# Altium PCB PCS - PCB.PcbDoc
Units mm, origin at the board's own origin, x right, y up, seen from the top; angles counter-clockwise.
Board outline 100 x 70 mm, 2 copper layers (Top Layer, Bottom Layer), stack 1.569 mm thick; 67 components, 31 nets, 259 pads, 122 vias.
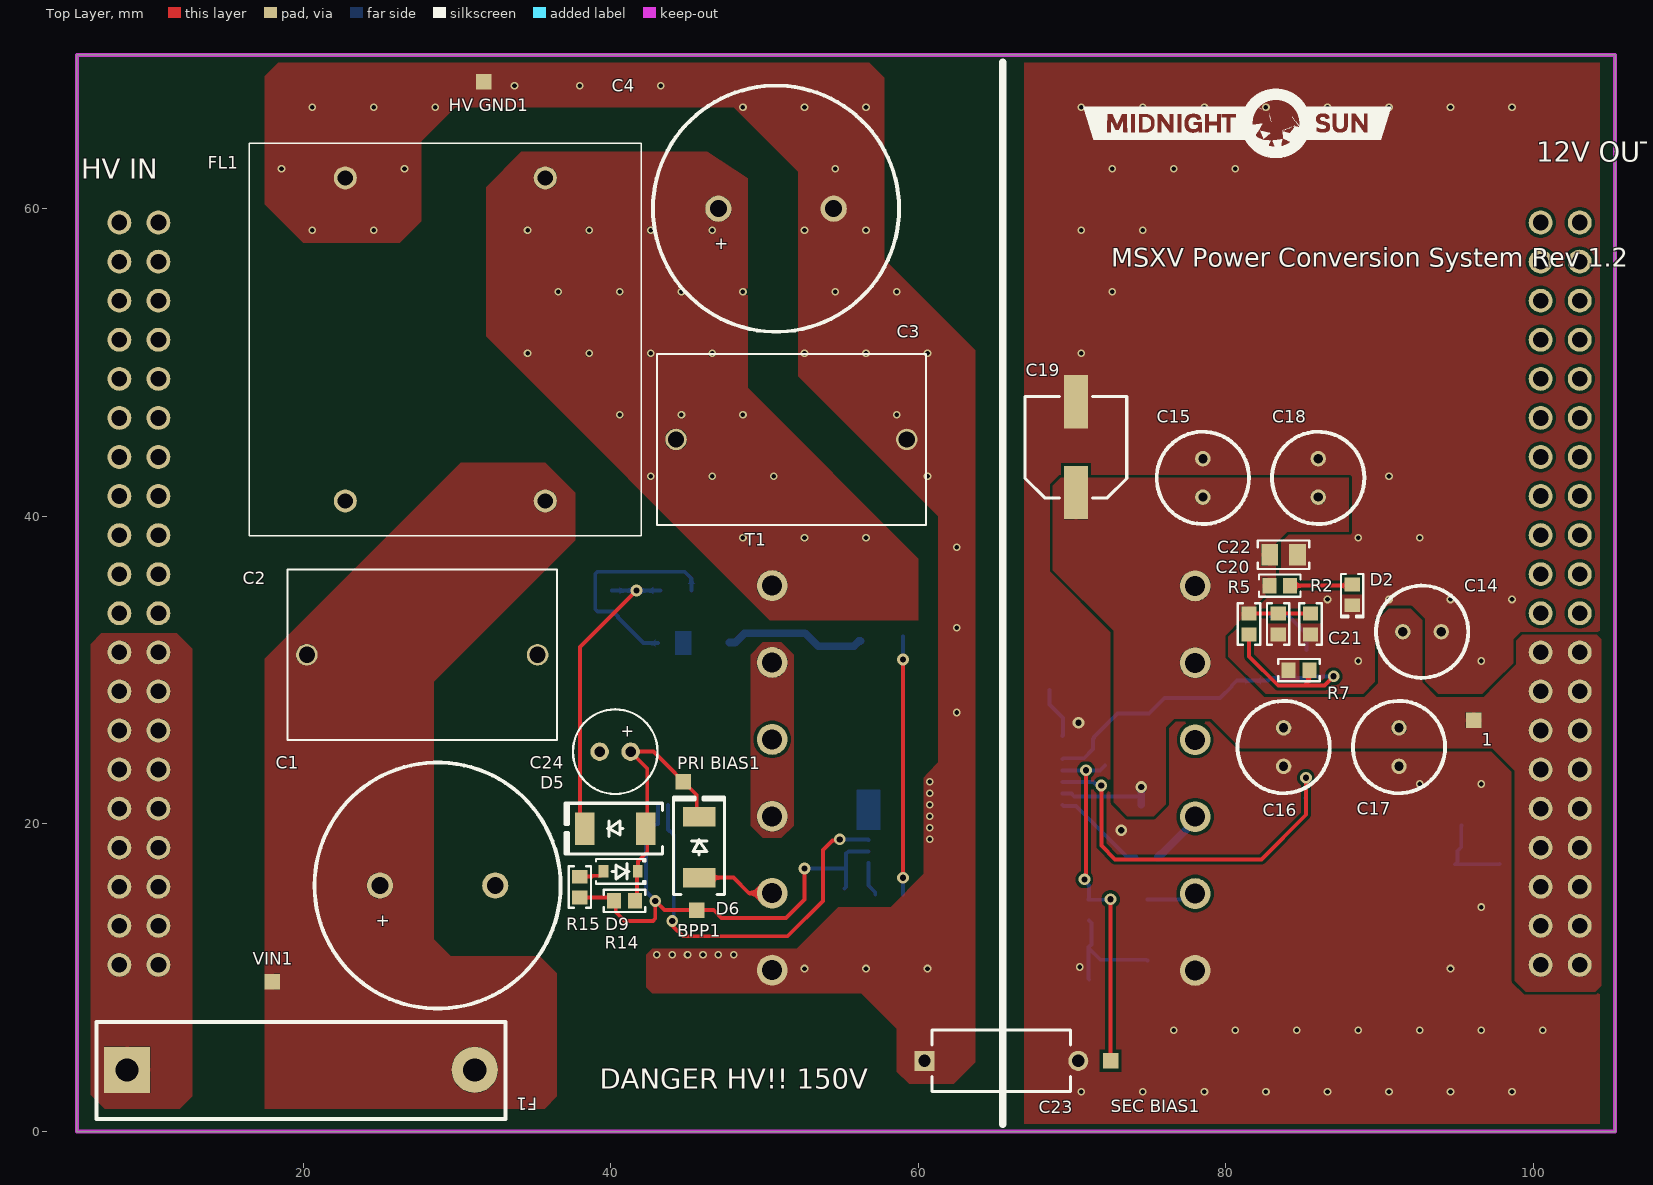
[diagram p0: Top Layer view]
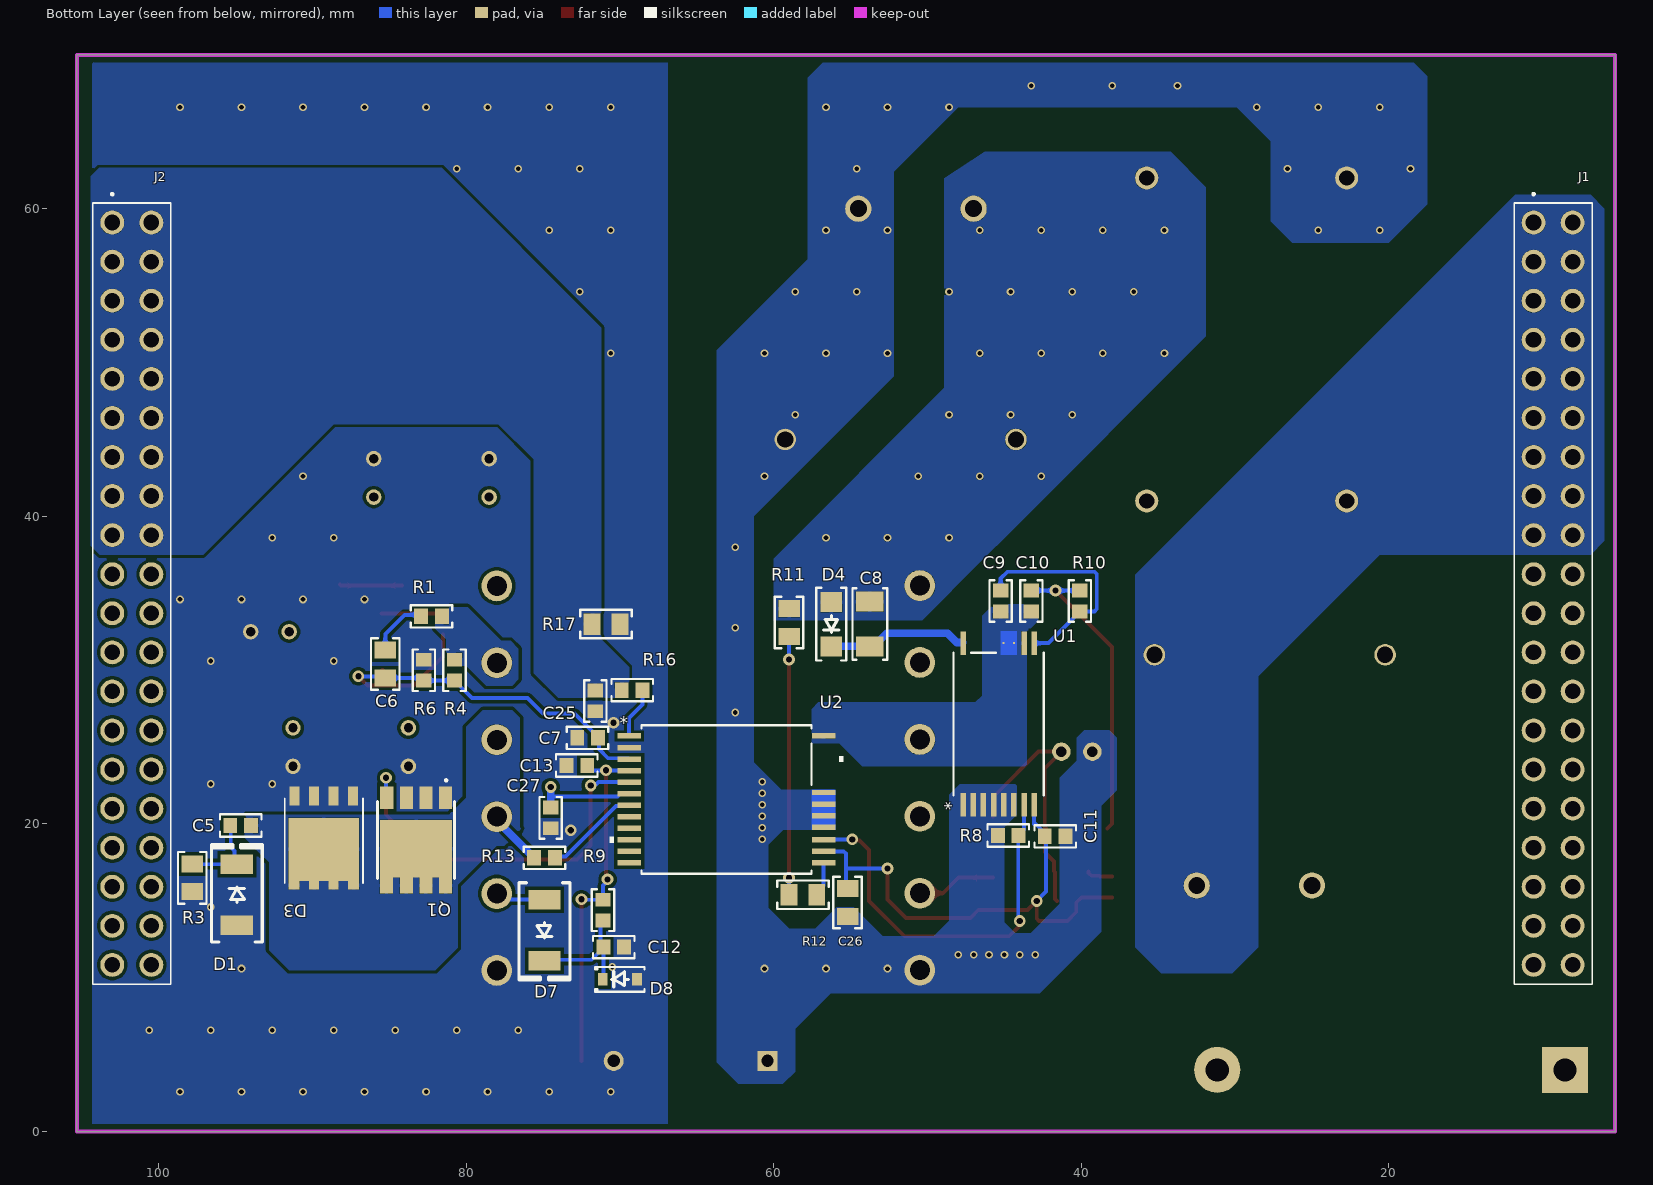
[diagram p1: Bottom Layer view, seen from below]
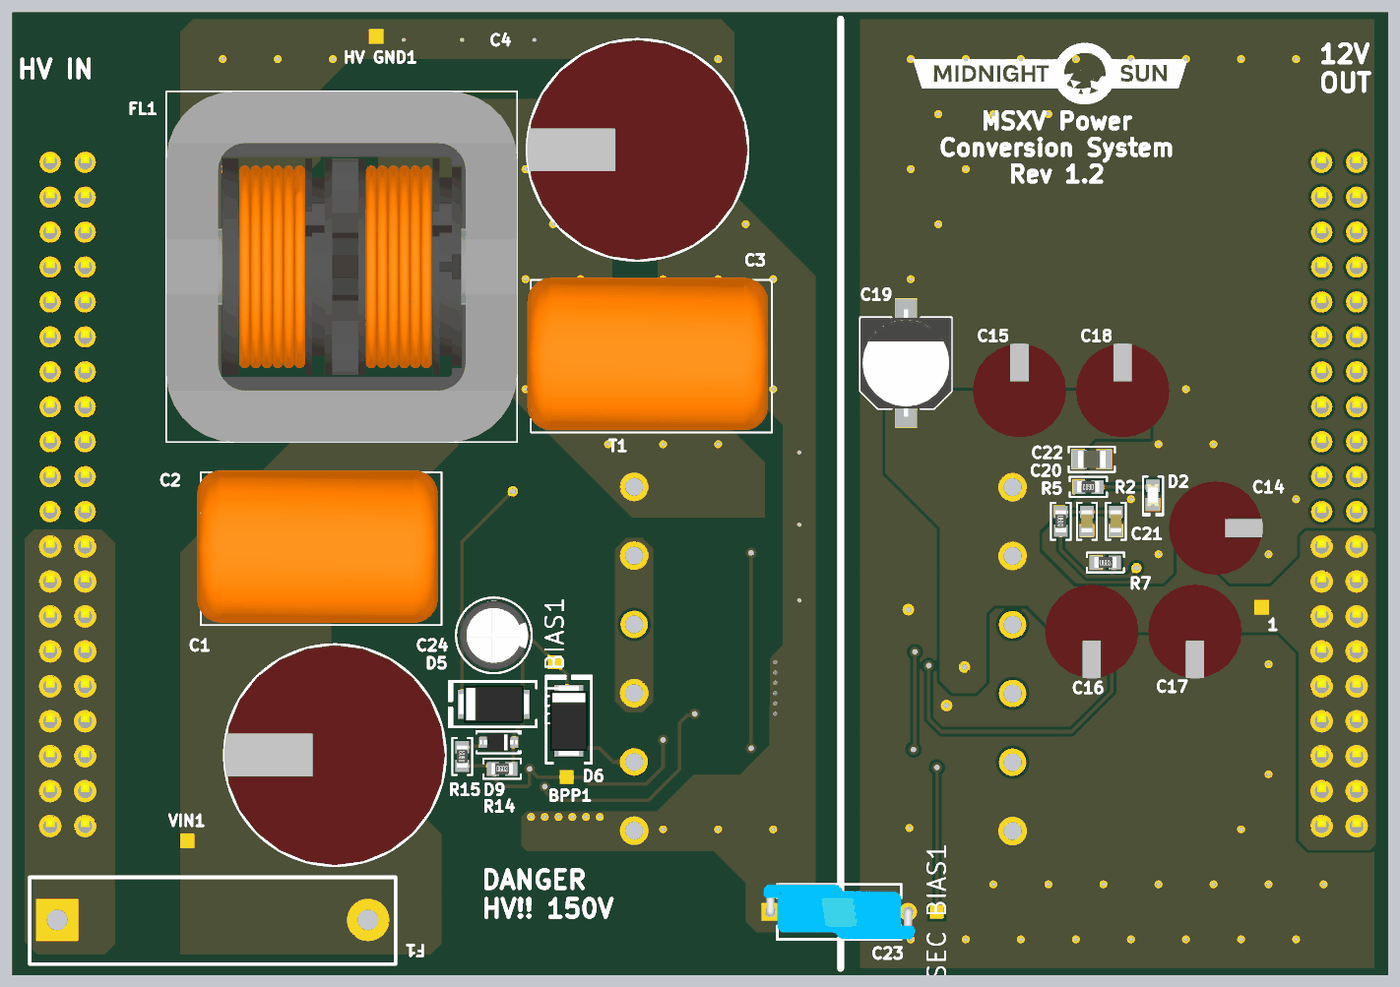
[diagram p2: 3D render of the assembled board from above, using the file's embedded part models]
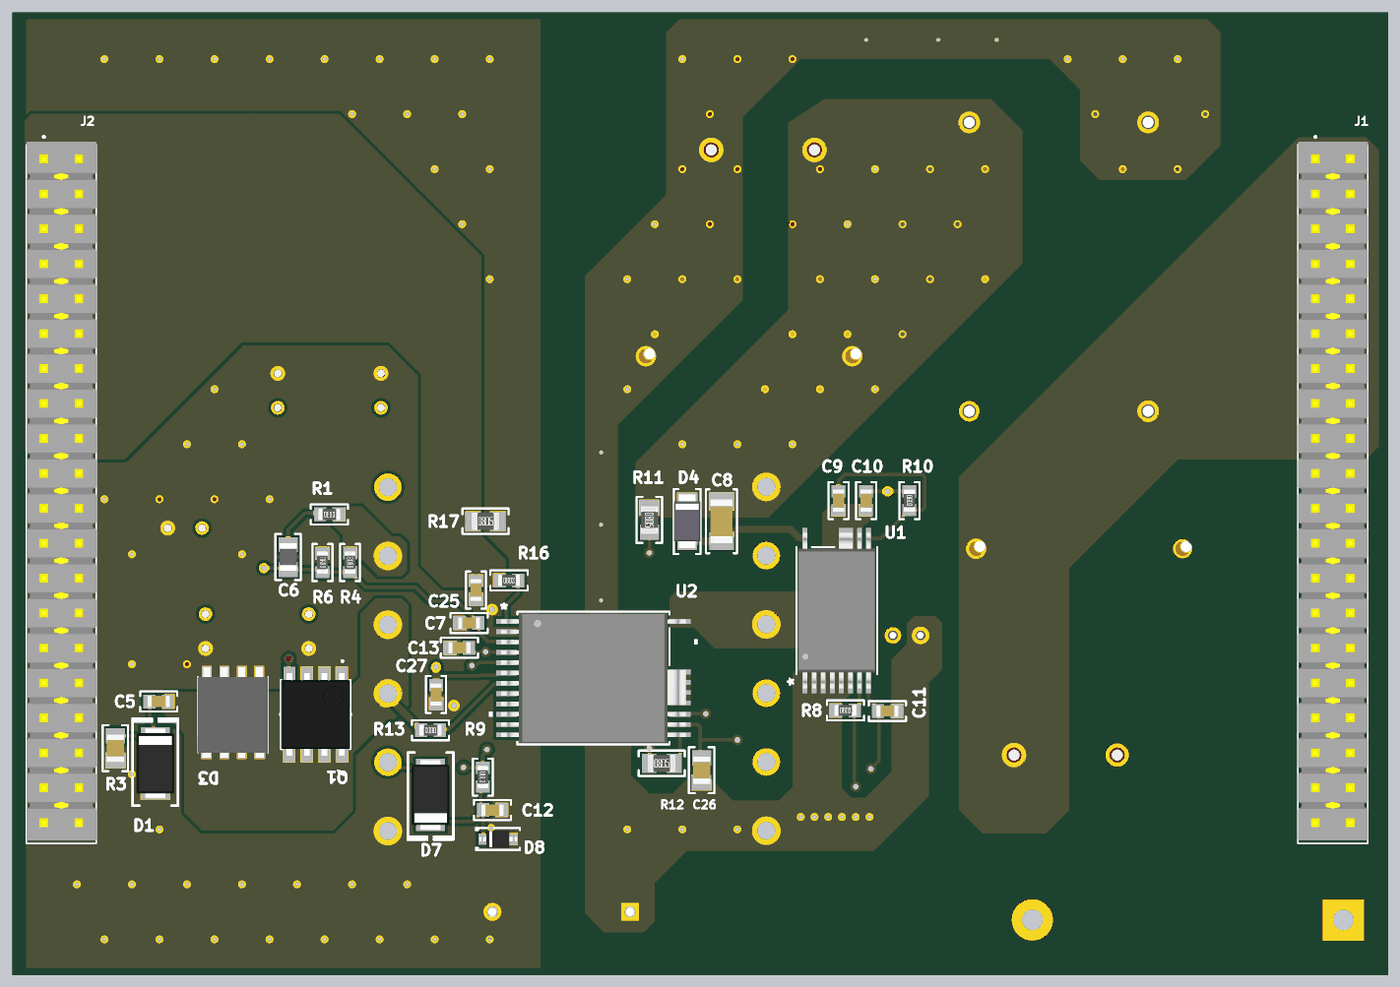
[diagram p3: 3D render of the assembled board from below, using the file's embedded part models]

## Layer stack, top to bottom
Top Solder: solder mask 0.0254, SM-001, Dk 4
Top Layer: signal copper 0.035
Dielectric 1: core 1.4986, Core-043, Dk 4.3
Bottom Layer: signal copper 0.035
Bottom Solder: solder mask 0.0254, SM-001, Dk 4

## Board outline
5.3,0 5.3,70 105.3,70 105.3,0

## Design rules (kind name [scope] priority, off if disabled: settings)
Clearance Clearance_1 [All] p1: gap=0.2 ignorepadtopadclearanceinfootprint=FALSE except(0.127: Arc-Arc Arc-Track Arc-SMDPad Arc-Via Track-Track Track-SMDPad Track-Via SMDPad-SMDPad SMDPad-Via THPad-Via Via-Via Region-Region; 0.15: Arc-Text Track-Text SMDPad-Text THPad-Text Via-Text Fill-Text Poly-Text Region-Text Text-Text; 0.208: Arc-Poly Track-Poly SMDPad-Poly THPad-Poly Via-Poly Fill-Poly Poly-Poly)
Height [All] p1: minheight=0 maxheight=100 prefheight=12.7
HoleSize [All] p1: absolutevalues=TRUE maxlimit=6.3 minlimit=0.2 maxpercent=80.000 minpercent=20.000
MinimumAnnularRing [All] p1: minimumring=0.1
MinimumSolderMaskSliver [All] p1: minsoldermaskwidth=0.026
PasteMaskExpansion [All] p1: expansion=0 percent=-40.000000
PlaneClearance [All] p1: clearance=0.6
PlaneConnect [All] p1: planeconnectstyle=NoConnect reliefexpansion=0.508 reliefentries=4 reliefconductorwidth=0.254 reliefairgap=0.254
PolygonConnect [InNet('GND') or InNet('HV_GND')] p1: connectstyle=Direct reliefconductorwidth=0.254 reliefentries=4 polygonreliefangle="90 Angle" airgapwidth=0.254
RoutingVias [All] p1: holewidth=0.3 width=0.5 viastyle="Through Hole" minholewidth=0.3 minwidth=0.5 maxholewidth=6 maxwidth=10
SilkToSilkClearance [All] p1: silktosilkclearance=0.1
SilkToSolderMaskClearance [IsPad] p1: minsilkscreentomaskgap=0.1 clearancetoexposedcopper=TRUE
SolderMaskExpansion [All] p1: expansion=0.038 istentingtop=FALSE
SupplyNets "Schematic Supply Nets_2" [InNet('GND')] p1: voltage=0.000
SupplyNets "Schematic Supply Nets_1" [InNet('12V')] p2: voltage=0.000
SupplyNets "Schematic Supply Nets" [InNet('HV_GND')] p3: voltage=0.000
Width [All] p1: maxlimit=2.54 minlimit=0.127 preferedwidth=0.254 minimp=50.000000 maximp=50.000000 favimp=50.000000
22 further rules are at their usual default settings.

## Classes and differential pairs
net class HV: HV_IN HV_POS NetC1_1
net class 5A: HV_IN HV_POS NetC1_1

## Components (designator, comment, footprint, x,y, rotation, side; value= is the part's Value field where it differs from the comment)
1 "Test Point SMD" "Test Point"#1 96.1,27 r90 top
BPP1 "Test Point SMD" "Test Point"#2 45.6,14.4 r90 bottom
C1 "CAP ALUM 47UF 20% 350V RADIAL TH" "Radial e7.5mm h27" 28.75,16 r0 top
C2 "CAP FILM 2.2UF 5% 450VDC RADIAL" "CAP FILM 2.2UF 5% 450VDC RADIAL-Footprint-1" 27.75,31 r180 top
C3 "CAP FILM 2.2UF 5% 450VDC RADIAL" "CAP FILM 2.2UF 5% 450VDC RADIAL-Footprint-1" 51.75,45 r180 top
C4 "CAP ALUM 100UF 20% 200V RADIAL" "Radial e7.5mm h27" 50.75,60 r0 top
C5 "CAP CER 2.2NF 50V 10% X7R 0603" "CAP 0603_1608" 94.65,19.9 r0 bottom
C6 "CAP CER 0.1UF 250V X7R 0805" "FER 0805_2012" 85.25,30.4 r90 bottom
C7 "CAP CER 330PF 250V X7R 0603" "CAP 0603_1608" 72.1,25.6 r0 bottom
C8 "CAP CER 0.1UF 250V X7R 1206" "CAP 1206_3216" 53.75,33 r90 bottom
C9 "CAP CER 0.1UF 100V 10% X7R 0603" "CAP 0603_1608" 45.25,34.5 r270 bottom
C10 "CAP CER 1UF 50V X5R 0603" "CAP 0603_1608" 43.25,34.5 r270 bottom
C11 "CAP CER 0.1UF 100V 10% X7R 0603" "CAP 0603_1608" 41.7,19.2 r0 bottom
C12 "CAP CER 10UF 25V 20% X5R 0603" "CAP 0603_1608" 70.4,12 r180 bottom
C13 "CAP CER 2.2UF 25V 10% X5R 0603" "CAP 0603_1608" 72.8,23.8 r0 bottom
C14 "CAP ALUM 220UF 20% 25V RADIAL" "CAP ALUM 220UF 20% 25V RADIAL-Footprint-1" 92.75,32.5 r0 top
C15 "CAP ALUM 220UF 20% 25V RADIAL" "CAP ALUM 220UF 20% 25V RADIAL-Footprint-1" 78.5,42.5 r90 top
C16 "CAP ALUM 220UF 20% 25V RADIAL" "CAP ALUM 220UF 20% 25V RADIAL-Footprint-1" 83.75,25 r270 top
C17 "CAP ALUM 220UF 20% 25V RADIAL" "CAP ALUM 220UF 20% 25V RADIAL-Footprint-1" 91.25,25 r270 top
C18 "CAP ALUM 220UF 20% 25V RADIAL" "CAP ALUM 220UF 20% 25V RADIAL-Footprint-1" 86,42.5 r90 top
C19 "CAP ALUM 47UF 20% 35V SMD" "CAP ALUM 6.3MM RADIAL SMD" 70.25,44.5 r90 top
C20 "CAP CER 10UF 25V 20% X5R 0603" "CAP 0603_1608" 83.4,33 r90 top
C21 "CAP CER 1UF 50V X5R 0603" "CAP 0603_1608" 85.5,33 r90 top
C22 "CAP CER 0.1UF 250V X7R 0805" "FER 0805_2012" 83.75,37.5 r180 top
C23 "CAP CER 2200PF 250V RADIAL" FP-DE1_D9_T4_F10_d0_6-0_0-MFG 65.4,4.6 r0 top
C24 "CAP ALUM 10UF 20% 100V RADIAL TH" FP-RAD-TH-D_5_0_5-L_11_1-MFG 40.3,24.7 r180 top
C25 "CAP CER 4.7UF 25V 10% X5R 0603" "CAP 0603_1608" 71.6,28 r90 bottom
C26 "CAP CER 4.7UF 50V 10% X5R 0805" "CAP 0805_2012" 55.2,14.9 r90 bottom
C27 "CAP CER 10UF 25V 20% X5R 0603" "CAP 0603_1608" 74.5,20.4 r90 bottom
D1 "ULTRA FAST RECOVERY RECTIFIERS 2" "DO 214AC SMA" 94.9,15.4 r90 bottom
D2 "LED GREEN CLEAR 2V 0603" "LED 0603_1608" 88.2,34.9 r270 top
D3 "DIODE SCHOTTKY 170V 30A PWRFLAT" "New footprint 1"#1 89.25,18.925 r0 bottom
D4 "DIODE ZENER 200V 800MW DO219AB" "DIODE ZENER 200V 800MW DO219AB-Footprint-1" 56.25,33 r270 bottom
D5 "ULTRA FAST RECOVERY RECTIFIERS 2" "DO 214AC SMA" 40.3,19.7 r180 top
D6 "ULTRA FAST RECOVERY RECTIFIERS 2" "DO 214AC SMA" 45.75,18.5 r90 top
D7 "ULTRA FAST RECOVERY RECTIFIERS 2" "DO 214AC SMA" 74.9,13.1 r270 bottom
D8 "DIODE, ZENER, 0.20W, 11.0V, 2%," "SOD 323" 70,9.9 r0 bottom
D9 "DIODE, ZENER, 0.20W, 11.0V, 2%," "SOD 323" 40.65,16.925 r0 top
F1 "FUSE CERAMIC 5A 600VAC/500VDC" 0ADKC5000-BE-Footprint-1 30.7,3.8 r90 top
FL1 "CMC 4.1MH 5A 2LN TH" "New footprint 1"#2 35.75,41 r90 top
"HV GND1" "Test Point SMD" "Test Point"#3 31.75,68.25 r90 top
J1 "CONN HDR .100\" 40POS" "CONN HDR .100\" 40POS-Footprint-1" 10.6,59.1 r270 bottom
J2 "CONN HDR .100\" 40POS" "CONN HDR .100\" 40POS-Footprint-1" 103,59.1 r270 bottom
"PRI BIAS1" "Test Point SMD" "Test Point"#3 44.725,22.75 r90 top
Q1 "MOSFET N-CH 100V 90A 8SOP" TPH3R70APL,L1Q 83.25,18.95 r0 bottom
R1 "RES 162K OHM 1% 1/10W 0603" "RES 0603_1608" 82.25,33.5 r180 bottom
R2 "RES 604 OHM 1% 1/10W 0603" "RES 0603_1608" 83.5,35.5 r180 top
R3 "RES 10 OHM 1% 1/2W 0805" "CAP 0805_2012" 97.8,16.5 r270 bottom
R4 "RES 127K OHM 1% 1/10W 0603" "RES 0603_1608" 80.75,30 r90 bottom
R5 "RES 0 OHM JUMPER 1/10W 0603" "RES 0603_1608" 81.5,33 r270 top
R6 "RES 14.3K OHM 1% 1/10W 0603" "RES 0603_1608" 82.75,30 r270 bottom
R7 "RES 0 OHM JUMPER 1/10W 0603" "RES 0603_1608" 84.75,30 r0 top
R8 "RES 15K OHM 1% 1/10W 0603" "RES 0603_1608" 44.75,19.25 r180 bottom
R9 "RES 47 OHM 1% 1/10W 0603" "RES 0603_1608" 71.1,14.4 r270 bottom
R10 "RES 1K OHM 1% 1/10W 0603" "RES 0603_1608" 40.1,34.5 r270 bottom
R11 "RES SMD 910K OHM 0.5% 1/4W 0805" "RES 0805_2012" 59,33.1 r270 bottom
R12 "RES SMD 910K OHM 0.5% 1/4W 0805" "RES 0805_2012" 58.1,15.4 r180 bottom
R13 "RES 300 OHM 1% 1/10W 0603" "RES 0603_1608" 74.9,17.8 r0 bottom
R14 "RES 1K OHM 1% 1/10W 0603" "RES 0603_1608" 40.9,15 r0 top
R15 "RES 100 OHM 1% 1/10W 0603" "RES 0603_1608" 38,15.9 r90 top
R16 "RES 10 OHM 1% 1/10W 0603" "RES 0603_1608" 69.2,28.7 r180 bottom
R17 "RES 0.006 OHM 1% 3/4W 0805" "RES 0805_2012" 70.9,33 r180 bottom
"SEC BIAS1" "Test Point SMD" "Test Point"#3 72.5,4.6 r90 top
T1 "EFD-30 PCS 240uH Transformer B66423GX187" "EFD-30 PCS 240uH Transformer B66423GX187-Footprint-1" 64.25,23 r270 top locked
U1 "CPZ1075M-TL" CPZ1076M-Footprint-1 45.25,26.5 r90 bottom
U2 "INN4077C-H182-TL" INN4074C-H185-Footprint-1 63.25,21.5 r180 bottom
VIN1 "Test Point SMD" "Test Point"#3 18,9.75 r90 top

## Footprints (in the part's own frame and the unit in brackets; to place one, negate y for a bottom-side part, rotate by r counter-clockwise, add the part's x,y. Pads: shape width x height; smd on the part's side, far side on the other; paste and mask are expansions set on the pad)
0ADKC5000-BE-Footprint-1 [mm]
  rect 3x3 hole 1.5: 1(0.217,22.135)
  round 3 hole 1.5: 2(0.217,-0.465)
  silkscreen extent -2.98,-2.46 3.32,24.14, body extent -2.98,-2.46 3.32,24.14, height 8.13
"CAP 0603_1608" [mm] "Chip Capacitor, 2-Leads, Body 1.60x0.80mm, IPC Medium Density"
  rect 0.9x1 smd: 1(-0.675,0) 2(0.675,0)
  silkscreen extent -1.35,-0.72 1.35,0.72, body extent -0.8,-0.41 0.8,0.41, height 0.82
"CAP 0805_2012" [mm] "Chip Capacitor, 2-Leads, Body 2.00x1.20mm, IPC Medium Density"
  rect 1.1x1.4 smd: 1(-0.9,0) 2(0.9,0)
  silkscreen extent -1.68,-0.92 1.68,0.92, body extent -1,-0.64 1,0.64, height 1.26
"CAP 1206_3216" [mm] "Chip Capacitor, 2-Leads, Body 3.25x1.60mm, IPC Medium Density"
  rect 1.3x1.8 smd: 1(-1.45,0) 2(1.45,0)
  silkscreen extent -2.32,-1.12 2.32,1.12, body extent -1.6,-0.81 1.6,0.81, height 1.62
"CAP ALUM 6.3MM RADIAL SMD" [mm] "Aluminum Electrolytic Capacitor, Body 6.50x6.50x5.50mm, IPC Low Density"
  rect 3.45x1.55 smd: 1(-2.95,0) 2(2.95,0)
  silkscreen extent -3.3,-3.3 3.3,3.3, body extent -3.9,-3.3 3.9,3.3, height 5.5
"CAP ALUM 220UF 20% 25V RADIAL-Footprint-1" [mm]
  round 1 hole 0.6: 1(-1.25,0) 2(1.25,0)
  silkscreen extent -3,-3 3,3, body extent -3.4,-3.4 3.43,3.4, height 12.26
"CAP FILM 2.2UF 5% 450VDC RADIAL-Footprint-1" [mm]
  round 1.4 hole 1.05: 1(-7.5,0) 2(7.5,0)
  silkscreen extent -8.75,-5.55 8.75,5.55, body extent -8.48,-5.72 9.02,5.39, height 15.88
"CONN HDR .100\" 40POS-Footprint-1" [mm]
  round 1.55 hole 1.02: 1(0,0) 2(2.54,0) 3(5.08,0) 4(7.62,0) 5(10.16,0) 6(12.7,0) 7(15.24,0) 8(17.78,0) 9(20.32,0) 10(22.86,0) 11(25.4,0) 12(27.94,0) 13(30.48,0) 14(33.02,0) 15(35.56,0) 16(38.1,0) 17(40.64,0) 18(43.18,0) 19(45.72,0) 20(48.26,0) 21(48.26,2.54) 22(45.72,2.54) 23(43.18,2.54) 24(40.64,2.54) 25(38.1,2.54) 26(35.56,2.54) 27(33.02,2.54) 28(30.48,2.54) 29(27.94,2.54) 30(25.4,2.54) 31(22.86,2.54) 32(20.32,2.54) 33(17.78,2.54) 34(15.24,2.54) 35(12.7,2.54) 36(10.16,2.54) 37(7.62,2.54) 38(5.08,2.54) 39(2.54,2.54) 40(0,2.54)
  silkscreen extent -1.9,-1.27 49.53,3.81, body extent -1.51,-1.27 49.29,3.81, height 10.67
CPZ1076M-Footprint-1 [mil]
  rect 60x14 smd paste+0 mask+0: 1(-207,95.94) 2(-207,69.96) 3(-207,43.98) 4(-207,17.99) 5(-207,-7.99) 6(-207,-33.98) 7(-207,-59.96) 8(-207,-85.94) 9(207,-85.94) 10(207,-59.96) 16(207,95.94)
  rect 5x5 smd paste-2.5 mask-2.5: 11(207,-33.98) 12(207,-7.99)
  Top Layer region: 177,-0.99 237,-0.99 237,-40.98 177,-40.98
  silkscreen extent -182,-111 182,121, body extent -223,-106 223,116, height 67
"DIODE ZENER 200V 800MW DO219AB-Footprint-1" [mm]
  rect 1.3x1.4 smd: 1(1.45,0) 2(-1.425,0)
  silkscreen extent -2.35,-0.97 2.37,0.97, body extent -1.95,-0.95 1.95,0.95, height 1.08
"DO 214AC SMA" [mm] "Molded Diode, 2-Leads, Body 4.30x2.60mm, IPC Medium Density"
  rect 1.27x2.1 smd: 1(1.985,0) 2(-1.985,0)
  silkscreen extent -3.08,-1.65 3.25,1.65, body extent -2.6,-1.37 2.6,1.37, height 2.4
"EFD-30 PCS 240uH Transformer B66423GX187-Footprint-1" [mm]
  round 2 hole 1.3: 1(-12.5,-13.75) 2(-7.5,-13.75) 3(-2.5,-13.75) 4(2.5,-13.75) 5(7.5,-13.75) 6(12.5,-13.75) 7(12.523,13.75) 8(7.523,13.75) 9(2.523,13.75) 10(-2.477,13.75) 11(-7.477,13.75) 12(-12.477,13.75)
  body extent -15,-15.5 15,15.5, height 13.1
"FER 0805_2012" [mm] "Chip Ferrite, 2-Leads, Body 2.00x1.20mm, IPC Medium Density"
  rect 1.1x1.4 smd: 1(-0.9,0) 2(0.9,0)
  silkscreen extent -1.68,-0.92 1.68,0.92, body extent -1,-0.64 1,0.64, height 1.26
FP-DE1_D9_T4_F10_d0_6-0_0-MFG [mm]
  rect 1.3x1.3 hole 0.8 paste-2539.97 mask+0: 1(-5,0)
  round 1.3 hole 0.8 paste-2539.97 mask+0: 2(5,0)
  silkscreen extent -4.5,-2 4.5,2, body extent -5.5,-2 5.5,2, height 12
FP-RAD-TH-D_5_0_5-L_11_1-MFG [mm]
  round 1.2 hole 0.7: 1(-1,0) 2(1.016,0)
  silkscreen extent -2.75,-2.75 2.75,2.75, body extent -2.85,-2.85 2.85,2.85, height 0.25
INN4074C-H185-Footprint-1 [mil]
  rect 60x14 smd paste+0 mask+0: 1(-241.34,166.23) 2(-241.34,136.7) 3(-241.34,107.17) 4(-241.34,77.64) 5(-241.34,48.12) 6(-241.34,18.59) 7(-241.34,-10.94) 8(-241.34,-40.47) 9(-241.34,-69.99) 10(-241.34,-99.52) 11(-241.34,-129.05) 12(-241.34,-158.58) 13(255.66,-158.58) 14(255.66,-129.05) 15(255.66,-99.52) 16(255.66,-67.04) 17(255.66,-37.51) 18(255.66,-7.99) 19(255.66,21.54) 24(255.66,166.23)
  Top Layer region: 225.66,-74.04 225.66,28.54 285.66,28.54 285.66,-74.04
  silkscreen extent -291,-186 306,194, body extent -257,-181 272,189, height 63
"LED 0603_1608" [mm] "Chip Diode, 2-Leads, Body 1.60x0.80mm, IPC Medium Density"
  rect 0.9x1 smd: 1(0.675,0) 2(-0.675,0)
  silkscreen extent -1.35,-0.72 1.48,0.72, body extent -0.8,-0.4 0.8,0.4, height 0.53
"New footprint 1"#1 [mm]
  rect 0.65x1.25 smd: 1(-1.905,-2.9) 1(-0.635,-2.9) 1(0.635,-2.9) 1(1.905,-2.9)
  rect 0.725x0.55 smd: 2(-1.938,2.9) 2(1.938,2.9)
  rect 0.638x0.55 smd: 2(-0.631,2.9) 2(0.631,2.9)
  rect 4.6x4.1 smd: 2(0,0.575)
  silkscreen extent -2.55,-2.76 2.55,2.76, body extent -2.55,-3.46 2.55,3.12, height 1.1
"New footprint 1"#2 [mm]
  round 1.5 hole 1: 1(0,0) 2(0,13) 3(21,13) 4(21,0)
  silkscreen extent -2.25,-6.25 23.25,19.25, body extent -2.25,-6.25 23.25,19.25, height 17.88
"Radial e7.5mm h27" [mm]
  round 1.7 hole 1.1: 1(-3.75,0) 2(3.75,0)
  silkscreen extent -8,-8 8,8, body extent -8.02,-8 8,8, height 37.51
"RES 0603_1608" [mm] "Chip Resistor, 2-Leads, Body 1.60x0.80mm, IPC Medium Density"
  rect 0.9x1 smd: 1(-0.675,0) 2(0.675,0)
  silkscreen extent -1.35,-0.72 1.35,0.72, body extent -0.8,-0.4 0.8,0.4, height 0.45
"RES 0805_2012" [mm] "Chip Resistor, 2-Leads, Body 2.00x1.25mm, IPC Medium Density"
  rect 1.1x1.4 smd: 1(-0.9,0) 2(0.9,0)
  silkscreen extent -1.68,-0.92 1.68,0.92, body extent -1,-0.62 1,0.63, height 0.6
"SOD 323" [mm] "SOD, 2-Leads, Body 1.25x2.50mm, IPC Medium Density"
  rect 0.625x0.83 smd: 1(1.112,0) 2(-1.112,0)
  silkscreen extent -1.6,-0.8 1.6,0.8, body extent -1.36,-0.63 1.36,0.62, height 1.05
"Test Point"#1 [mm]
  rect 1x1 smd paste-2: TP(-0.25,0)
"Test Point"#2 [mm]
  rect 1x1 smd far side paste-2: TP(0,0)
"Test Point"#3 [mm]
  rect 1x1 smd paste-2: TP(0,0)
TPH3R70APL,L1Q [mm]
  rect 0.85x1.45 smd: 1(1.905,-2.75) 2(-1.905,-2.75) 2(-0.635,-2.75) 2(0.635,-2.75)
  rect 0.85x1.05 smd: 3(-1.925,2.95) 3(-0.635,2.95) 3(0.635,2.95) 3(1.925,2.95)
  rect 4.7x3.75 smd: 3(0,0.55)
  silkscreen extent -2.5,-3.93 2.5,2.5, body extent -2.65,-3 2.65,3, height 0.95

## Part data
1 BPP1 "HV GND1" "PRI BIAS1" "SEC BIAS1" VIN1: library part CMP-004-0000-4, "1.27mm x 1.27mm SMD Square"
C1: library part CMP-001-00158-1, "47 µF 350 V Aluminum Electrolytic Capacitors Radial, Can 2000 Hrs @ 105°C", Capacitance=47µF, Case/Package=Radial, Dielectric Code="Aluminum Electrolytic", Tolerance=20%, Voltage Rating=350V
C2 C3: library part CMP-001-00150-1, "2.2 µF Film Capacitor 450V Polypropylene (PP), Metallized Radial", Capacitance=2.2µF, Case/Package=7450, Tolerance=5%, Voltage Rating=450V
C4: library part CMP-001-00159-3, "100 µF 200 V Aluminum Electrolytic Capacitors Radial, Can 2000 Hrs @ 105°C", Capacitance=100µF, Case/Package=Radial, Dielectric Code="Aluminum Electrolytic", Tolerance=20%, Voltage Rating=200V
C5: library part CMP-001-00089-6, "±10% 50V Ceramic Capacitor X7R 0603 (1608 Metric)", Capacitance=2.2nF, Case/Package=0603, Dielectric Code=X7R, Tolerance=10%, Voltage Rating=50V
C6 C22: library part CMP-001-00145-1, "Ceramic Capacitor, Multilayer, Ceramic, 250V, 10% +Tol, 10% -Tol, X7R, 15% TC, 0.1uF, Surface Mount, 0805", Capacitance=100nF, Case/Package=0805, Dielectric Code=X7R, Tolerance=10%, Voltage Rating=250V
C7: library part CMP-001-00020-1, "330 pF ±10% 250V Ceramic Capacitor X7R 0603 (1608 Metric)", Capacitance=330pF, Case/Package=0603, Dielectric Code=X7R, Tolerance=10%, Voltage Rating=250V
C8: library part CMP-001-00147-1, "0.1 µF ±10% 250V Ceramic Capacitor X7R 1206 (3216 Metric)", Capacitance=100nF, Case/Package=1206, Dielectric Code=X7R, Tolerance=10%, Voltage Rating=250V
C9 C11: library part CMP-013-0022-14, "Ceramic Capacitor, Multilayer, Ceramic, 100V, 10% +Tol, 10% -Tol, X7R, 15% TC, 0.1uF, Surface Mount, 0603", Capacitance=100nF, Case/Package=0603, Dielectric Code=X7R, Tolerance=10%, Voltage Rating=100V
C10 C21: library part CMP-013-0013-8, "1µF ±10% 50V Ceramic Capacitor X7R 0603 (1608 Metric)", Capacitance=1µF, Case/Package=0603, Dielectric Code=X5R, Tolerance=10%, Voltage Rating=50V
C12 C20 C27: library part CMP-013-0018-6, "10µF ±20% 25V Ceramic Capacitor X5R 0603 (1608 Metric)", Capacitance=10µF, Case/Package=0603, Dielectric Code=X5R, Tolerance=20%, Voltage Rating=25V
C13: library part CMP-013-0100-6, "2.2µF ±10% 25V Ceramic Capacitor X5R 0603 (1608 Metric)", Capacitance=2.2µF, Case/Package=0603, Dielectric Code=X5R, Tolerance=10%, Voltage Rating=25V
C14 C15 C16 C17 C18: library part CMP-001-00144-1, "220 µF 25 V Aluminum Electrolytic Capacitors Radial, Can 2000 Hrs @ 85°C", Capacitance=220µF, Case/Package=SMT, Tolerance=20%, Voltage Rating=25V
C19: library part CMP-013-0000-4, "47µF 35V Aluminum Electrolytic Capacitors Radial, Can - SMD 1000 Hrs @ 85°C", Capacitance=47µF, Case/Package=Radial, Tolerance=20%, Voltage Rating=35V
C23: library part CMP-001-00157-1, "2200 pF ±20% 250VAC Ceramic Capacitor E Radial, Disc", Capacitance=2.2nF, Case/Package=Radial, Dielectric Code=Ceramic, Tolerance=20%, Voltage Rating=250V
C24: library part CMP-001-00029-3, "10 µF 100 V Aluminum Electrolytic Capacitors Radial, Can 2000 Hrs @ 85°C", Capacitance=10µF, Case/Package=Radial, Tolerance=20%, Voltage Rating=100V
C25: library part CMP-013-0104-5, "4.7µF ±10% 25V Ceramic Capacitor X5R 0603 (1608 Metric)", Capacitance=4.7µF, Case/Package=0603, Dielectric Code=X7R, Tolerance=10%, Voltage Rating=25V
C26: library part CMP-013-0066-5, "4.7µF ±20% 50V Ceramic Capacitor X5R 0805 (2012 Metric)", Capacitance=4.7µF, Case/Package=0805, Dielectric Code=X5R, Tolerance=20%, Voltage Rating=50V
D1 D5 D6 D7: library part CMP-004-00072-2, "Diode 200 V 1A Surface Mount SMA/DO-214AC", Case/Package=DO-214AC-SMA, Forward Current=1A, Forward Voltage=1V, Reverse Blocking Voltage=200V
D2: library part CMP-011-0001-9, "Green 562nm LED Indication - Discrete 2V 0603 (1608 Metric)", Case/Package="0603 (1608 Metric)", Colour=Green, Forward Current=20mA, Forward Voltage=2V
D3: library part CMP-004-00074-2, "Diode 170 V 30A Surface Mount PowerFlat™ (5x6)", Case Connection=CATHODE, Case/Package=8-PowerVDFN, Forward Current=30A, Forward Voltage=700mV, Max Operating Temperature=175°C, Non-rep Pk Forward Current-Max=200A, Package Body Material=Plastic, Package Shape=Rectangular, Package Style="SMALL OUTLINEMeter", Peak Reflow Temperature (Cel)=260°C, Rep Pk Reverse Voltage-Max=170V, Additional Feature="FREE WHEELING DIODE", Application(s)="FAST RECOVERY POWER", Diode Element Material=SILICON, Diode Type=RECTIFIER, JESD-609 Code=e3, Max Output Current=30A, Moisture Sensitivity Level=1, Number of Elements=1, Number of Phases=1, Pins=3, Qualification Status="Not Qualified", Reach SVHC Compliant=No, Reverse Blocking Voltage=170V, RoHS Compliant=Yes, Surface Mount=Yes, Technology=SCHOTTKY, Terminal Finish=Tin, Terminal Form="No Lead", Terminal Position=DUAL
D4: library part CMP-004-00005-2, "Zener Diode 200 V 800 mW Surface Mount DO-219AB (SMF)", Breakdown Voltage=200V, Case/Package=DO-219AB, Reverse Blocking Voltage=200V, Type=Zener
D8 D9: library part CMP-004-00076-1, "Zener Diode 11 V 200 mW ±2% Surface Mount SOD-323", Breakdown Voltage=11V, Case/Package="SOD 323", Reverse Blocking Voltage=11V, Type=Zener
F1: library part CMP-005-00013-1, "FUSE CERAMIC 5A 600VAC/500VDC FOOTPRINT IS FOR 5x20mm HOLDER", Current Rating=5A, Max Operating Temperature=125°C, Min Operating Temperature=-55°C, Voltage Rating (AC)=600V, Voltage Rating (DC)=500V, Approvals=cURus, Fuse Type="Cartridge, Ceramic", Mount=Holder, Packaging=Bulk
FL1: library part CMP-00030-00009-2, "4.1 mH @ 10 kHz 2 Line Common Mode Choke Through Hole 5A DCR 35mOhm", Case/Package="4 Pin", Inductance @10KHz=4.1mH, Max Current=5A
J1 J2: library part CMP-002-00024-2, "Board Connector, 40 Contact(s), 2 Row(s), Male, Straight, Solder Terminal", Max Operating Temperature=125°C, Min Operating Temperature=-55°C, Connector Type="BOARD CONNECTOR", Gender=Male, Mounting Technology=Board, Pins=40, RoHS Compliant=Yes
Q1: library part CMP-013-00052-4, "N-Channel 100 V 90A (Tc) 960mW (Ta), 170W (Tc) Surface Mount 8-SOP Advance (5x5)", Case/Package="8-SOP Advance (5x5)", Drain to Source Voltage (Vdss)=100V, Power=170W, Vgs (Max)=20V, Vgs(th) (Max) @ Id="2.5V @ 1mA"
R1: library part CMP-00036-1, "Fixed Resistor, Metal Glaze/thick Film, 0.1W, 162000ohm, 75V, 1% +/-Tol, 100ppm/Cel, Surface Mount, 0603", Case/Package=0603, Power Rating=100mW, Resistance=162k, Temperature Coefficient=100ppm/°C, Tolerance=1%, Voltage Rating=75V
R2: library part CMP-00038-1, "Fixed Resistor, Metal Glaze/thick Film, 0.1W, 604ohm, 75V, 1% +/-Tol, 100ppm/Cel, Surface Mount, 0603", Case/Package=0603, Power Rating=100mW, Resistance=604, Temperature Coefficient=100ppm/°C, Tolerance=1%, Voltage Rating=75V
R3: library part CMP-00047-4, "10 Ohms ±1% 0.5W, 1/2W Chip Resistor 0805 (2012 Metric) Automotive AEC-Q200, Pulse Withstanding Thick Film", Case/Package=0805, Power Rating=500mW, Resistance=10, Temperature Coefficient=200ppm/°C, Tolerance=1%, Voltage Rating=400V
R4: library part CMP-00028-1, "Fixed Resistor, Metal Glaze/thick Film, 0.1W, 127000ohm, 75V, 1% +/-Tol, 100ppm/Cel, Surface Mount, 0603", Case/Package=0603, Power Rating=100mW, Resistance=127k, Temperature Coefficient=100ppm/°C, Tolerance=1%, Voltage Rating=75V
R5 R7: library part CMP-010-0000-7, "Fixed Resistor, Metal Glaze/thick Film, 0.1W, 0ohm, Surface Mount, 0603", Case/Package=0603, Power Rating=100mW, Resistance=0, Temperature Coefficient=0ppm/°C, Tolerance=0%, Voltage Rating=75V
R6: library part CMP-00053-1, "14.3 kOhms ±1% 0.1W, 1/10W Chip Resistor 0603 (1608 Metric) Automotive AEC-Q200 Thick Film", Case/Package=0603, Power Rating=100mW, Resistance=14.3k, Temperature Coefficient=100, Tolerance=1%, Voltage Rating=200V
R8: library part CMP-010-0035-11, "15 kOhms ±1% 0.1W, 1/10W Chip Resistor 0603 (1608 Metric) Moisture Resistant Thick Film", Case/Package=0603, Power Rating=100mW, Resistance=15k, Temperature Coefficient=100ppm/°C, Tolerance=1%, Voltage Rating=75V
R9: library part CMP-009-00196-9, "Fixed Resistor, Metal Glaze/thick Film, 0.1W, 47ohm, 75V, 1% +/-Tol, 100ppm/Cel, Surface Mount, 0603", Case/Package=0603, Power Rating=100mW, Resistance=47, Temperature Coefficient=100ppm/°C, Tolerance=1%, Voltage Rating=75V
R10 R14: library part CMP-009-00014-17, "1 kOhms ±1% 0.1W, 1/10W Chip Resistor 0603 (1608 Metric) Moisture Resistant Thick Film", Case/Package=0603, Power Rating=100mW, Resistance=1k, Temperature Coefficient=100ppm/°C, Tolerance=1%, Voltage Rating=75V
R11 R12: library part CMP-00148-1, "910 kOhms ±0.5% 0.25W, 1/4W Chip Resistor 0805 (2012 Metric) Automotive AEC-Q200 Thick Film", Case/Package=0805, Power Rating=250mW, Resistance=910k, Temperature Coefficient=50, Tolerance=0.5%, Voltage Rating=476V
R13: library part CMP-00045-2, "300 Ohms ±1% 0.1W, 1/10W Chip Resistor 0603 (1608 Metric) Automotive AEC-Q200 Thick Film", Case/Package=0603, Power Rating=100mW, Resistance=300, Temperature Coefficient=100ppm/°C, Tolerance=1%, Voltage Rating=75V
R15: library part CMP-009-00178-14, "100 Ohms ±1% 0.1W, 1/10W Chip Resistor 0603 (1608 Metric) Moisture Resistant Thick Film", Case/Package=0603, Power Rating=100mW, Resistance=100, Temperature Coefficient=100ppm/°C, Tolerance=1%, Voltage Rating=75V
R16: library part CMP-00047-2, "Fixed Resistor, Metal Glaze/thick Film, 0.1W, 10ohm, 75V, 1% +/-Tol, 100ppm/Cel, Surface Mount, 0603", Case/Package=0603, Power Rating=100mW, Resistance=10, Temperature Coefficient=100ppm/°C, Tolerance=1%, Voltage Rating=75V
R17: library part CMP-00031-1, "Res 0805 50PPM 0.006 Ohm 1.0%", Case/Package=0805, Power Rating=750mW, Resistance=6m, Temperature Coefficient=±50ppm/°C, Tolerance=1%, Voltage Rating=100V
T1: library part CMP-012-00025-15, "EFD30/15/9-N87"
U1: library part CMP-031-00055-7, "Converter Offline Flyback, Secondary Side SR Topology 102kHz MinSOP-16A", Case/Package=InSOP16, Max Supply Voltage=85V, Min Supply Voltage=265V, Manufacturer Part Number=CPZ1075M-TL
U2: library part CMP-031-00054-7, "ZVS Flyback Switcher/Controller IC InSOP-24D 135W", Case/Package=InSOP-24D, Manufacturer Part Number=INN4074C-H185, Max Supply Voltage=85V, Min Supply Voltage=264V

## Via types
v1: diameter 0.5, hole 0.3, Top Layer to Bottom Layer, 94 vias
v2: diameter 0.5, hole 0.3, Top Layer to Bottom Layer, tented both sides, 12 vias
v3: diameter 0.762, hole 0.406, Top Layer to Bottom Layer, tented both sides, 11 vias
v4: diameter 0.762, hole 0.406, Top Layer to Bottom Layer, 5 vias

## Nets (pads, with @x,y where several pads share a name; then routed paths per layer and width w, separated by ;. In a path a pad name is that pad's centre, name@x,y a point inside that pad or via, vN(x,y) a via of type N, cw(c..) or ccw(c..) an arc to the next point about the centre after c; other vN are vias at no path point)
12V: 1.TP C14.1 C15.1 C16.1 C17.1 C18.1 C19.1 C20.2 C21.2 C22.2 C27.2 J2.12 J2.13 J2.14 J2.15 J2.16 J2.17 J2.18 J2.19 J2.20 J2.21 J2.22 J2.23 J2.24 J2.25 J2.26 J2.27 J2.28 J2.29 R1.2 R2.2 R4.2 R5.1 T1.11 T1.12 U2.6 | length 10.4
  Top Layer w0.254: R5.1 C20.2 C21.2
  Bottom Layer w0.254: U2.6 69.964,21.972 70.136,21.8 71.282,21.8 71.307,21.775 74.3,21.775 74.5,21.575
  Bottom Layer w0.508: C27.2@74.5,21.275 74.5,21.775 v4(74.5,22.4)
BPP: BPP1.TP C11.2 C26.2 R14.1 R15.1 U1.8 U2.14 | length 33
  Top Layer w0.254: R15.1 40,15.225 40.332,14.893 40.332,14.268 40.9,13.7 42.751,13.7 42.9,13.849 v3(42.9,15) 43.5,14.4 BPP1.TP 46.7,14.4 47.2,13.9 51.4,13.9 52.6,15.1 v3(52.6,17.1)
  Bottom Layer w0.254: C11.2@42.35,19.375 42.967,19.992 43.067,19.992 U1.8 ; C11.2 42.3,19.125 42.3,15.603 42.9,15.003 v3(42.9,15) ; v3(52.6,17.1) 55.3,17.1 ; C26.2 55.3,15.9 55.3,17.1 ; U2.14 55.449,18.222 55.3,18.073 55.3,17.1
FB: C6.1 C7.1 R4.1 R5.2 R6.2 R7.2 U2.3 | length 29.4
  Top Layer w0.254: R5.2 81.5,30.9 83.4,29 85.1,29 ; R7.2 85.368,29.943 85.368,29.268 85.1,29 ; v4(87,29.6) 86.4,29 85.1,29
  Bottom Layer w0.254: U2.3 69.431,24.273 70.773,24.273 71.368,24.868 71.368,25.543 C7.1 71.425,25.65 72.963,27.187 74.987,27.187 76,28.2 79.625,28.2 80.377,28.952 80.377,29.002 80.7,29.325 R4.1 R6.2 82.925,29.5 C6.1 85.35,29.6 v4(87,29.6)
GND: C7.2 C12.2 C13.2 C14.2 C15.2 C16.2 C17.2 C18.2 C19.2 C20.1 C21.1 C22.1 C23.2 C25.1 C27.1 D1.2 D2.1 D3.1 D8.2 Q1.2 R3.2 R6.1 R7.1 R17.2 T1.7 U2.2
  other v1: 70.6,2.6 74.6,2.6 78.6,2.6 82.6,2.6 86.6,2.6 90.6,2.6 94.6,2.6 98.6,2.6 76.6,6.6 80.6,6.6 84.6,6.6 88.6,6.6 92.6,6.6 96.6,6.6 100.6,6.6 94.6,10.6 70.5,10.7 96.6,14.6 92.6,22.6 96.6,22.6 88.6,30.6 96.6,30.6 86.6,34.6 90.6,34.6 94.6,34.6 98.6,34.6 88.6,38.6 92.6,38.6 90.6,42.6 70.6,50.6 72.6,54.6 70.6,58.6 74.6,58.6 72.6,62.6 76.6,62.6 80.6,62.6 70.6,66.6 74.6,66.6 78.6,66.6 82.6,66.6 86.6,66.6 90.6,66.6 94.6,66.6 98.6,66.6
  other v4: 73.2,19.6 70.421,26.579
HSD: R8.2 U1.7 U2.15 | length 25.6
  Top Layer w0.254: v3(44,13.7) 44.097,13.603 44.097,13.303 44.7,12.7 51.5,12.7 53.8,15 53.8,18.3 54.415,18.915 54.815,18.915 v3(54.9,19)
  Bottom Layer w0.254: U1.7 43.727,19.648 R8.2@44.075,19.3 ; v3(44,13.7) 44,13.837 44.1,13.937 44.1,19.225 R8.2 ; v3(54.9,19) 56.728,19 U2.15
HV_GND: "HV GND1.TP" C3.1 C4.2 C11.1 C23.1 C24.2 C26.1 FL1.3 R8.1 T1.6 U1.1 U1.2 U1.3 U1.4 U1.5 U1.6 U2.16 U2.17 U2.18 U2.19
  other v1: 52.6,10.6 56.6,10.6 60.6,10.6 43,11.5 44,11.5 45,11.5 46,11.5 47,11.5 48,11.5 60.6,42.6 58.6,46.6 52.6,50.6 56.6,50.6 60.6,50.6 54.6,54.6 58.6,54.6 20.6,58.6 24.6,58.6 52.6,58.6 56.6,58.6 18.6,62.6 26.6,62.6 54.6,62.6 20.6,66.6 24.6,66.6 28.6,66.6 48.6,66.6 52.6,66.6 56.6,66.6
  other v2: 60.75,19 60.75,19.75 60.75,20.5 60.75,21.25 60.75,22 60.75,22.75 62.5,27.25 62.5,32.75 62.5,38 33.75,68 38,68 43.25,68
HV_IN: C3.2 C4.1 C8.2 D4.2 FL1.4 R11.1 T1.1
  other v1: 48.6,38.6 52.6,38.6 56.6,38.6 42.6,42.6 46.6,42.6 50.6,42.6 40.6,46.6 44.6,46.6 48.6,46.6 34.6,50.6 38.6,50.6 42.6,50.6 46.6,50.6 36.6,54.6 40.6,54.6 44.6,54.6 48.6,54.6 34.6,58.6 38.6,58.6 42.6,58.6 46.6,58.6
HV_NEG: C1.2 C2.1 FL1.2 J1.1 J1.2 J1.3 J1.4 J1.5 J1.6 J1.7 J1.8 J1.9 J1.32 J1.33 J1.34 J1.35 J1.36 J1.37 J1.38 J1.39 J1.40
HV_POS: F1.1 J1.12 J1.13 J1.14 J1.15 J1.16 J1.17 J1.18 J1.19 J1.20 J1.21 J1.22 J1.23 J1.24 J1.25 J1.26 J1.27 J1.28 J1.29
LV_OUT-: C25.2 J2.1 J2.2 J2.3 J2.4 J2.5 J2.6 J2.7 J2.8 J2.9 J2.32 J2.33 J2.34 J2.35 J2.36 J2.37 J2.38 J2.39 J2.40 R16.1 R17.1
NetC1_1: C1.1 C2.2 F1.2 FL1.1 VIN1.TP
NetC5_1: C5.1 D3.2 Q1.3 R13.2 T1.9 T1.10 | length 3.7
  Bottom Layer w0.508: R13.2 75.575,17.85 75.771,18.046 75.821,18.046 78,20.225 T1.9
NetC5_2: C5.2 D1.1 R3.1 | length 5.6
  Bottom Layer w0.254: C5.2 95.3,19.875 95.3,18.5 95.052,18.252 95.052,17.537 D1.1 97.785,17.385 R3.1
NetC6_2: C6.2 R1.1 | length 3.9
  Bottom Layer w0.254: R1.1 83.025,33.6 84,33.6 85.25,32.35 C6.2
NetC8_1: C8.1 D4.1 U1.16 | length 9.3
  Bottom Layer w0.508: U1.16@47.726,31.797 48.097,31.797 48.7,32.4 52.65,32.4 53.5,31.55 55.81,31.55 56.148,31.888 D4.1@56.25,31.888
NetC9_1: C9.1 R10.2 U1.9 | length 14.6
  Bottom Layer w0.254: U1.9 42.142,31.758 40.473,33.427 40.473,33.502 40.15,33.825 39.149,33.825 39,33.974 39,36.251 39.149,36.4 44.8,36.4 45.25,35.95 C9.1
NetC9_2: C9.2 C10.2 T1.3 U1.10 U1.11 U1.12 U2.24
NetC10_1: C10.1 D5.1 R10.1 | length 20.3
  Top Layer w0.254: D5.1 38,20.015 38,31.5 v4(41.675,35.175)
  Bottom Layer w0.254: R10.1 v4(41.675,35.175) C10.1
NetC12_1: C12.1 D7.1 D8.1 R9.2 | length 8.1
  Bottom Layer w0.254: R9.2 71.25,13.575 71.25,12.175 C12.1 C12.1@71.075,11.95 ; D8.1 71.075,9.938 C12.1@71.075,11.95 ; D7.1 74.84,11.175 71.85,11.175 C12.1@71.075,11.95
NetD2_2: D2.2 R2.1 | length 4.1
  Top Layer w0.254: R2.1 88.125,35.5 D2.2
NetD6_2: D6.2 T1.5 | length 5.2
  Top Layer w0.254: D6.2 47.985,16.515 49,15.5 T1.5
NetD7_2: D7.2 T1.8 | length 3.3
  Bottom Layer w0.254: D7.2 77.136,15.085 77.528,15.477 T1.8
NetD9_2: D9.2 R15.2 | length 1.7
  Top Layer w0.254: R15.2 38.8,16.575 38.862,16.637 39.352,16.637 39.538,16.822 D9.2
NetQ1_1: Q1.1 U2.5 | length 25.1
  Top Layer w0.254: v3(71.9,22.5) 71.9,18.6 72.797,17.703 82.303,17.703 85.2,20.6 v3(85.2,23)
  Bottom Layer w0.254: U2.5 71.397,22.722 71.522,22.597 71.803,22.597 v3(71.9,22.5) ; Q1.1 85.2,21.745 v3(85.2,23)
NetR11_2: R11.2 R12.1 | length 16.8
  Top Layer w0.254: v3(59,16.5) v3(59,30.7)
  Bottom Layer w0.254: R12.1 v3(59,16.5) ; v3@59,30.739 R11.2
NetR12_2: R12.2 U2.13 | length 2.3
  Bottom Layer w0.254: U2.13 56.756,15.994 57.2,15.55 R12.2
NetR13_1: R13.1 U2.7 | length 6.3
  Bottom Layer w0.254: U2.7 69.431,21.171 70.254,21.171 73.543,17.882 74.143,17.882 R13.1
NetR16_2: R16.2 U2.1 | length 3.3
  Bottom Layer w0.254: R16.2 68.525,27.775 69.4,26.9 69.4,25.773 69.38,25.753 U2.1
NetT1_2: T1.2 T1.4
PRI_BIAS: "PRI BIAS1.TP" C24.1 D5.2 D6.1 D9.1 R14.2 | length 17.8
  Top Layer w0.254: C24.1@41.381,24.519 41.381,24.619 C24.1 ; C24.1@41.481,24.519 C24.1 ; R14.2 41.7,15.125 D9.1@41.7,16.862 ; D9.1 41.771,16.933 41.771,17.572 42.381,18.183 42.381,19.7 D5.2 ; D5.2@42.381,19.796 42.381,23.619 41.431,24.569 C24.1 ; D6.1 45.6,20.635 45.6,21.875 42.775,24.7 C24.1
SEC_BIAS: "SEC BIAS1.TP" C13.1 R9.1 U2.4 | length 23.4
  Top Layer w0.254: v3(70.8,16.4) 70.897,16.497 70.897,16.8 70.9,16.803 v3(70.9,23.5) ; 72.5,4.6 v3(72.5,15.1)
  Bottom Layer w0.254: U2.4 70.9,23.472 71.802,23.472 72.125,23.795 C13.1 ; v3(70.8,16.4) 70.8,16.3 71.1,16 R9.1 ; R9.1@71.075,15.1 R9.1 ; v3(72.5,15.1) 72.475,15.075 R9.1
pads on no net: J1.10 J1.11 J1.30 J1.31 J2.10 J2.11 J2.30 J2.31 U2.8 U2.9 U2.10 U2.11 U2.12

## Polygon pours and split planes (outlines as drawn)
HV_POS on Top Layer "NONET_L-01_P-001" (solid, pour order 23): 7.1,1.5 6.2,2.4 6.2,31.7 6.9,32.4 11.8,32.4 12.8,31.4 12.8,2.3 12,1.5
HV_GND on Top Layer "HV_GND_L01_P013" (solid, remove dead copper, pour order 13): 57.8,68.5 56.8,69.5 18.4,69.5 17.5,68.6 17.5,60.3 20,57.8 26.3,57.8 27.7,59.2 27.7,64.4 29.9,66.6 48,66.6 52.2,62.4 52.2,49.1 61.3,40 61.3,24 60.6,23.3 60.35,23 60.35,19.619 60.34,19.623 60.34,16.76 60.35,16.75 58.2,14.6 54.8,14.6 52.1,11.9 42.7,11.9 42.3,11.5 42.3,9.4 42.7,9 56.3,9 58.6,6.7 58.6,3.9 59.4,3.1 62.3,3.1 63.7,4.5 63.7,50.8 57.85,56.65 57.8,56.7
12V on Top Layer "12V_L01_P003" (solid, pour order 3): 104.4,9.5 104,9.1 99.5,9.1 99.475,9.1 98.775,9.8 98.775,23.475 97.325,24.925 80.975,24.925 79.05,26.85 76.65,26.85 76.1,26.3 76.1,21.3 75.3,20.5 73.6,20.5 72.7,21.4 72.7,32.55 68.75,36.5 68.75,42 69.25,42.5 88,42.5 88,39 84,39 83.25,38.25 83.25,35.55 79.95,32.25 79.95,30.8 82.5,28.25 89,28.25 89.9,29.15 89.9,33.3 90.6,34 92,34 92.75,33.25 92.75,29.2 93.7,28.25 96.75,28.25 97.55,29.05 98.875,30.375 98.875,31.9 99.275,32.3 104.1,32.3 104.4,32 104.4,31.9
GND on Top Layer "GND_L01_P014" (solid, remove dead copper, pour order 14): 104.3,0.5 66.9,0.5 66.9,69.5 104.3,69.5
NetT1_2 on Top Layer "NONET_L-01_P-001" (solid, pour order 22): 51.1,31.8 51.9,31 51.9,19.9 51.1,19.1 49.9,19.1 49.1,19.9 49.1,31 49.9,31.8 50.5,31.8
HV_IN on Top Layer "HV_IN_L01_P002" (solid, pour order 2): 31.9,51.7 31.9,61.4 34.2,63.7 46.273,63.7 48.9,61.987 48.9,48.35 60,37.25 60,33.25 50.35,33.25
NetC1_1 on Top Layer "NETC1_1_L01_P000" (solid, pour order 0): 36.5,10.3 35.4,11.4 29.6,11.4 28.5,12.5 28.5,29.25 37.7,38.45 37.7,41.55 35.75,43.5 30.25,43.5 17.5,30.75 17.5,1.5 28.5,1.5 35.7,1.5 36.5,2.3
12V on Bottom Layer "12V_L02_P004" (solid, pour order 4): 76.6,29.4 77,29 78.7,29 80,30.3 81.3,30.3 81.3,32 82,32.7 82,34.1 79.9,34.1 77.7,31.9 77.1,31.9 76.6,31.4
LV_OUT- on Bottom Layer "LV_OUT-_L02_P015" (solid, pour order 15): 104.4,62.1 103.85,62.65 81.575,62.65 71.2,52.275 71.2,32 69.4,30.2 69.4,28.2 74,28.2 75.6,29.8 75.6,43.7 77.9,46 88.6,46 97.1,37.5 103.8,37.5 104.4,38.1
HV_NEG on Bottom Layer "HV_NEG_L02_P007" (solid, pour order 7): 36.5,12 34.8,10.3 30.2,10.3 28.5,12 28.5,29.6 20.6,37.5 6.9,37.5 6,38.4 6,60 6.9,60.9 11.8,60.9 36.5,36.2
HV_IN on Bottom Layer "HV_IN_L02_P021" (solid, pour order 21): 46.5,37.1 44.6,39 31.9,51.7 31.9,61.4 34.2,63.7 46.273,63.7 48.9,61.987 48.9,48.35 60,37.25 60,33.25 50.35,33.25
NetC5_1 on Bottom Layer "NETC5_1_L02_P001" (solid, pour order 1): 92.8,11.8 91.5,10.5 82,10.5 80.55,11.95 80.55,16.05 78,18.6 77.5,18.6 76.4,19.7 76.5,19.8 76.5,26.9 77,27.4 78.9,27.4 80,26.3 80,21.7 81.1,20.6 85.7,20.6 94.3,20.6 94.4,20.5 94.4,19.1 92.8,17.5 92.8,17.2
GND on Bottom Layer "GND_L02_P018" (solid, remove dead copper, pour order 18): 104.3,69.508 104.3,0.5 66.9,0.5 66.9,69.494
HV_GND on Bottom Layer "HV_GND_L02_P012" (solid, remove dead copper, pour order 12): 56.8,69.5 57.8,68.5 57.8,56.7 57.85,56.65 63.7,50.8 63.7,4.5 62.3,3.1 59.4,3.1 58.6,3.9 58.6,6.7 56.3,9 42.7,9 38.7,13 38.7,21.2 37.7,22.2 37.7,25.6 38.2,26.1 39.8,26.1 40.3,25.6 40.3,24.1 41.4,23 41.4,14.8 43.3,12.9 44.3,12.9 45.004,13.604 45.004,19.8 44.2,20.599 44.2,22.5 44.3,22.6 47.9,22.6 48.6,21.9 48.6,13.7 49.6,12.7 52.95,12.7 52.95,12.75 54.8,14.6 55.9,14.6 57.3,13.2 59,13.2 60.34,14.54 60.34,18.66 59.381,19.619 55.994,19.619 55.994,22.225 59.525,22.225 61.3,24 61.3,40 52.2,49.1 52.2,62.4 48,66.6 29.9,66.6 27.7,64.4 27.7,59.2 26.3,57.8 20,57.8 17.5,60.3 17.5,68.6 18.4,69.5
NetC9_2 on Bottom Layer "NETC9_2_L02_P010" (solid, pour order 10): 42.675,34.1 42.85,34.275 45.725,34.275 46.45,33.55 46.45,28.35 46.9,27.9 57.1,27.9 57.525,27.475 57.525,25.25 55.75,25.25 54.257,23.757 43.55,23.75 43.55,32.47 42.675,33.345

## Keep-outs
Keep-Out Layer:
  the board outline again, w0.25

## Silkscreen, mask and mechanical layers (free items; w line width, h text height)
Top Overlay:
  drawing of 181 lines, arcs and shapes, not listed
  text "12V OUT" at 100.175,63.05 h1.3
  text "HV IN" at 5.575,61.95 h1.3
  text "MSXV Power Conversion System Rev 1.2" at 72.542,56.225 h1.2
  text "DANGER HV!! 150V" at 39.3,2.8 h1.3

## Text inside footprints (layer, text, board x,y; h text height)
C1: Top Overlay "+" at 24.733,13.35 h0.8
C4: Top Overlay "+" at 46.733,57.35 h0.8
C24: Top Overlay "+" at 41.55,26.345 h0.75 r180
U1: Mechanical 13 "*" at 46.838,22.068 h0.8 r270; Bottom Overlay "*" at 48.1,20.9 h0.8 r270
U2: Mechanical 13 "*" at 68.402,24.95 h0.8; Bottom Overlay "*" at 70,26.2 h0.8